# Altium PCB InterfaceBoard.PcbDoc
Units mm, origin at the board's own origin, x right, y up, seen from the top; angles counter-clockwise.
Board outline 24 x 45 mm, 4 copper layers (Top Layer, Int1 (GND), Int2 (PWR), Bottom Layer), stack 1.369 mm thick; 74 components, 58 nets, 253 pads, 0 vias.
Unrouted connection lines stored in the file: 183.
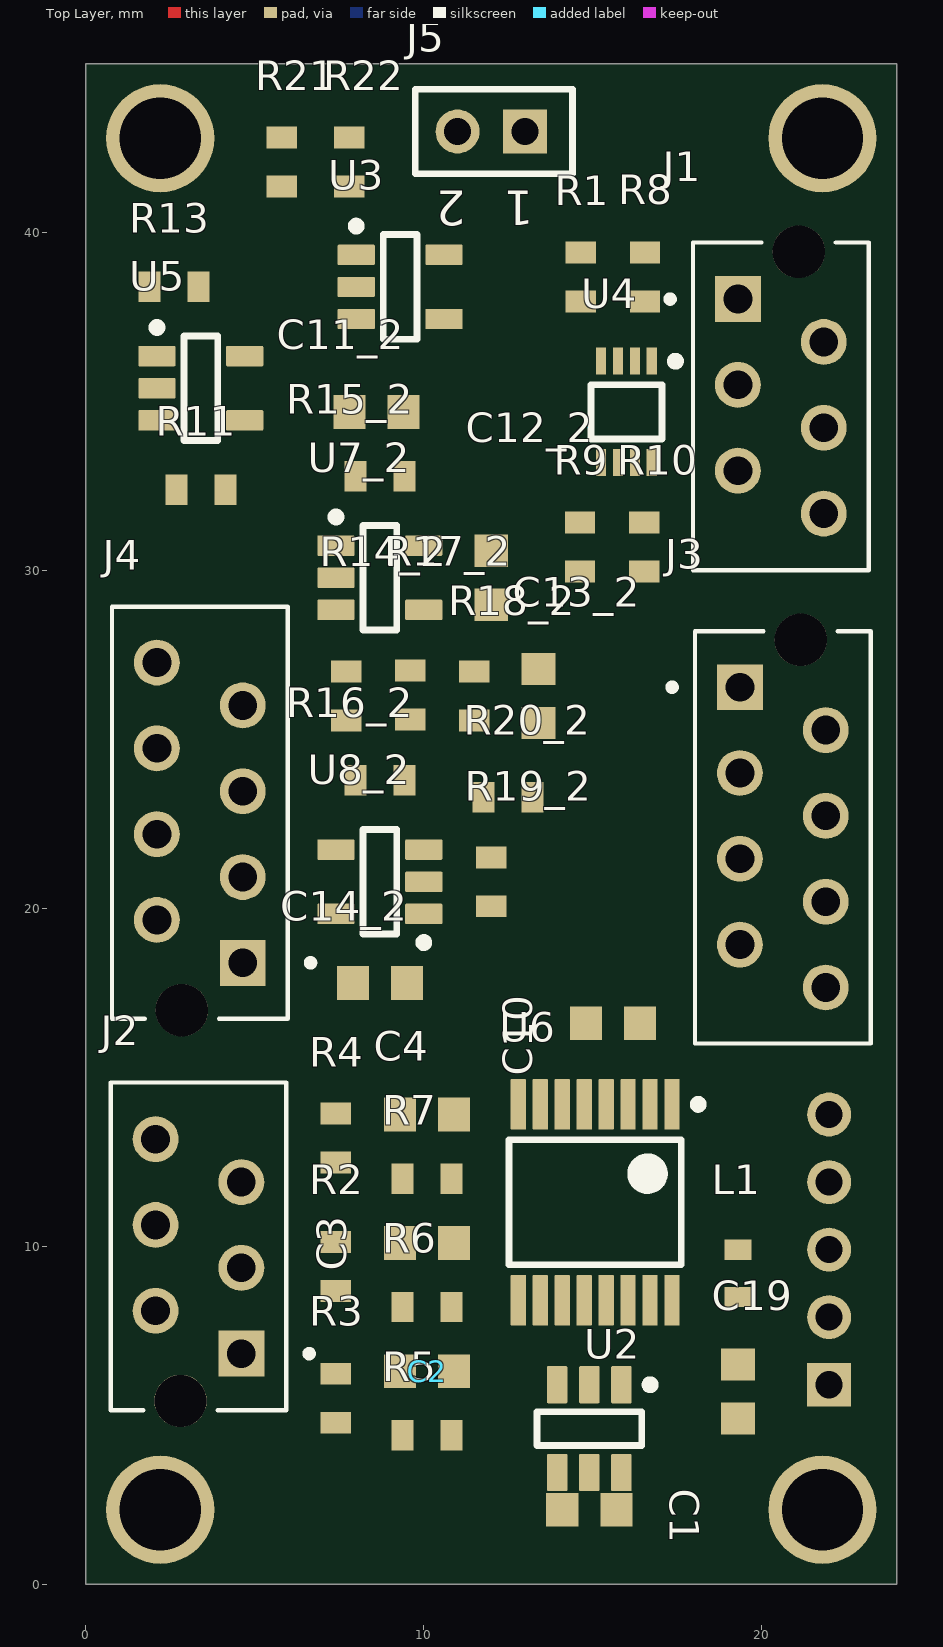
[diagram p0: Top Layer view]
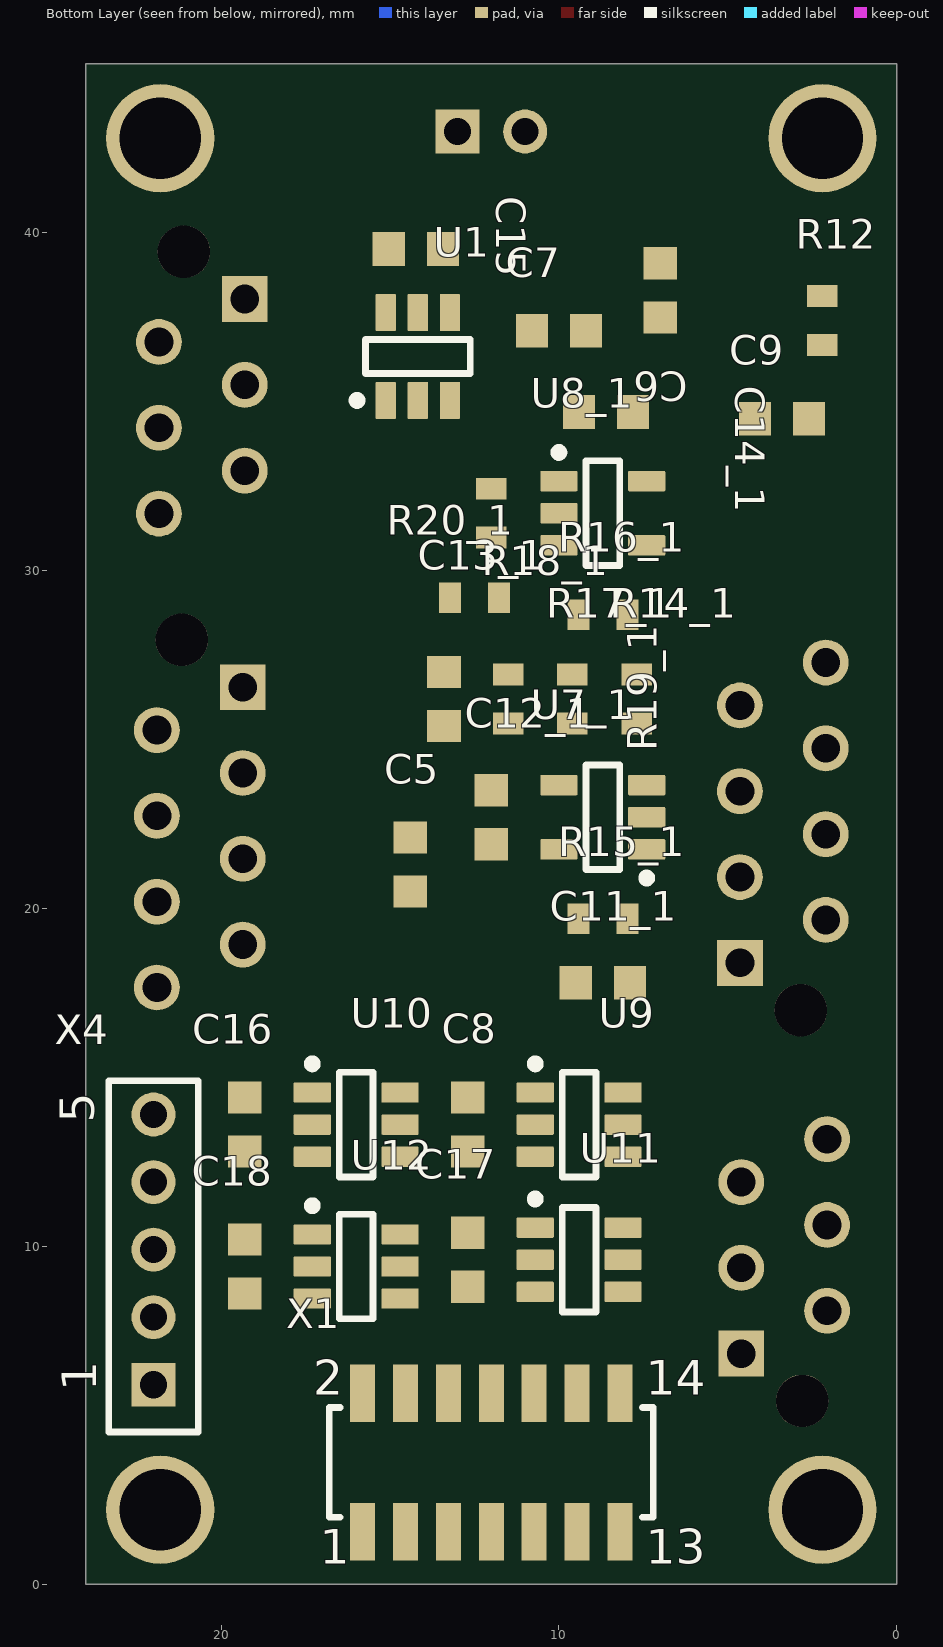
[diagram p1: Bottom Layer view, seen from below]
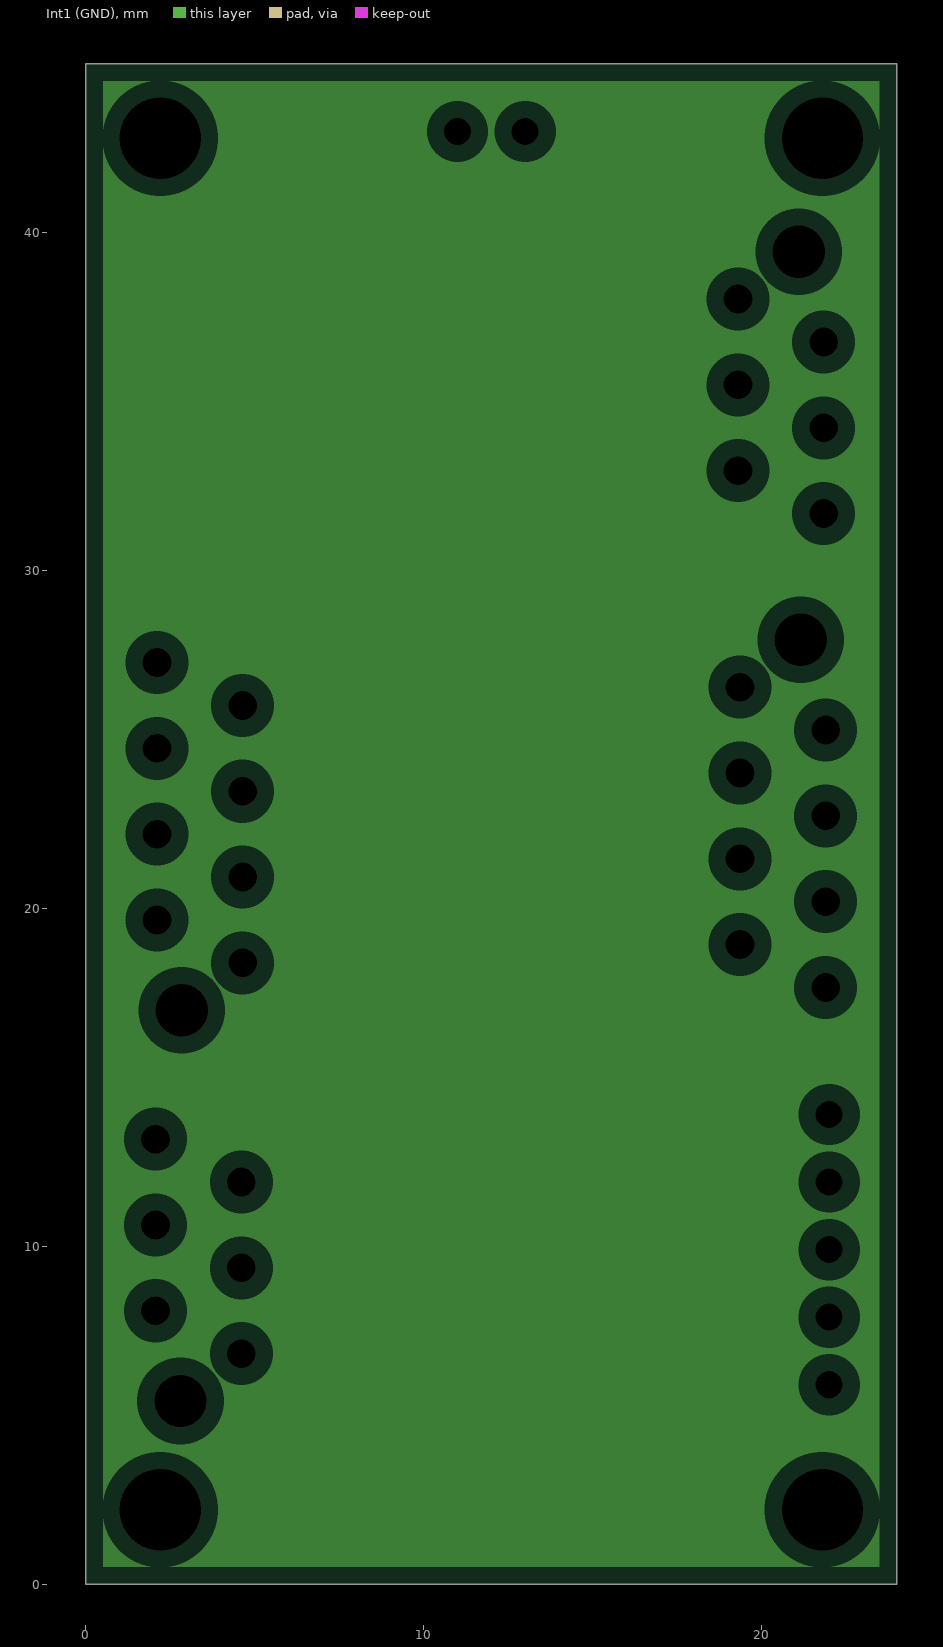
[diagram p2: Int1 (GND), clearances drawn from the general rule]
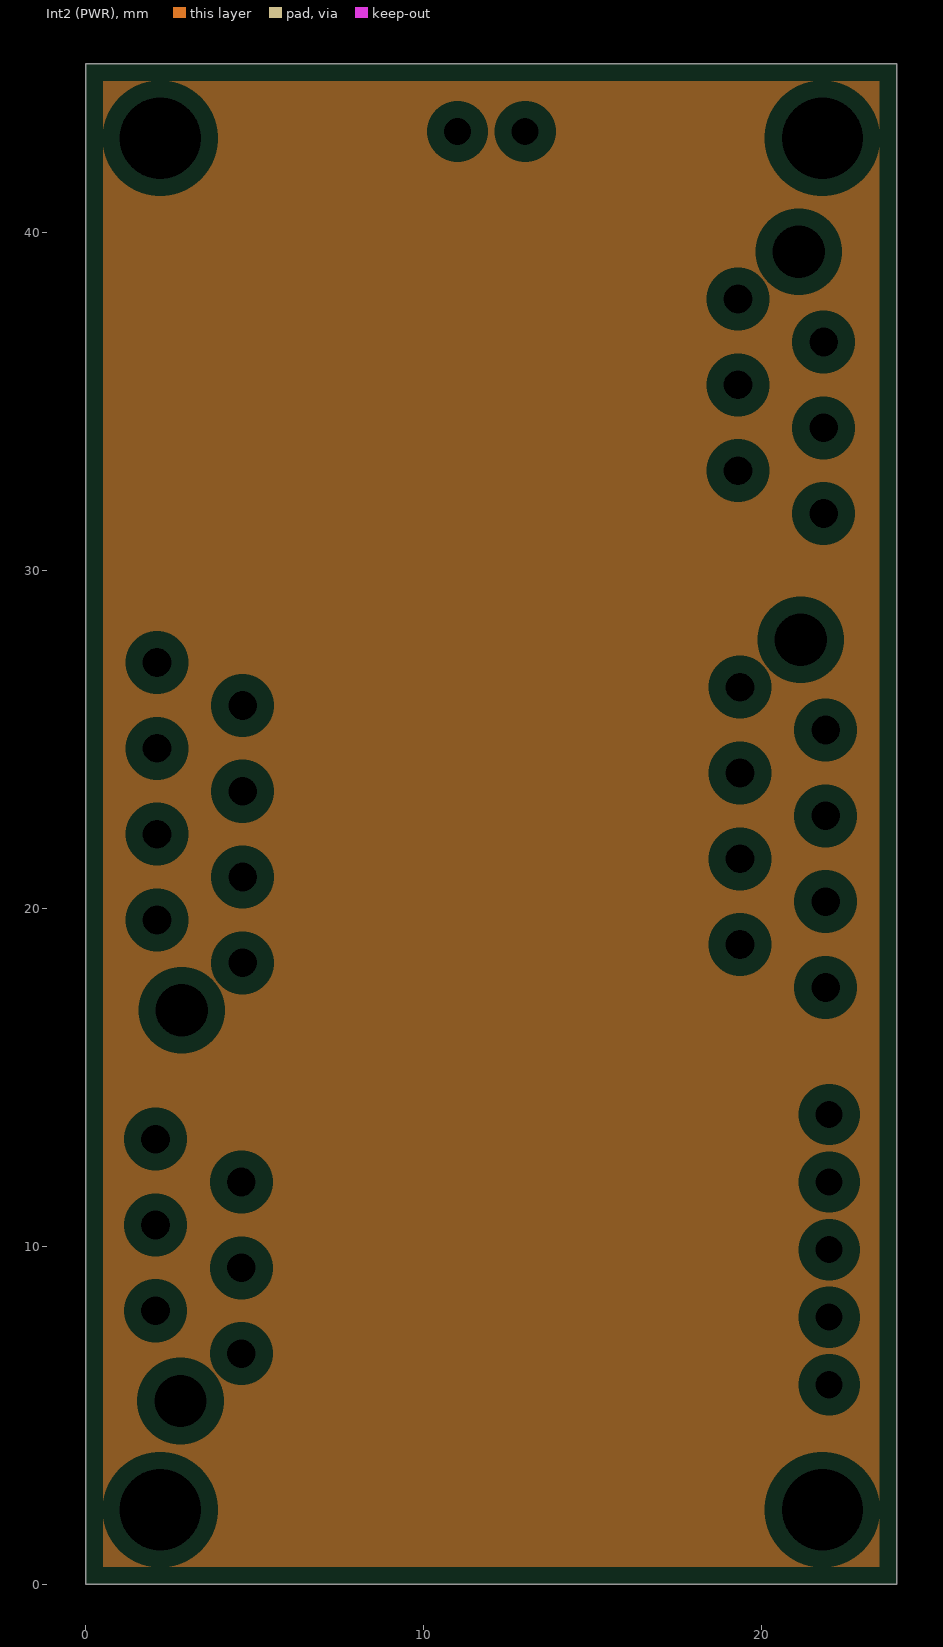
[diagram p3: Int2 (PWR), clearances drawn from the general rule]

## Layer stack, top to bottom
Top Solder: solder mask 0.0254, SM-001, Dk 4
Top Layer: signal copper 0.035
Dielectric 1: prepreg 0.1295, PP-017, Dk 4.3
Dielectric 2: prepreg 0.1295, PP-017, Dk 4.3
Int1 (GND): plane copper 0.035
Dielectric 3: core 0.7112, Core-039, Dk 4.8
Int2 (PWR): plane copper 0.035
Dielectric 4: prepreg 0.1295, PP-017, Dk 4.3
Dielectric 5: prepreg 0.1295, PP-017, Dk 4.3
Bottom Layer: signal copper 0.035
Bottom Solder: solder mask 0.0254, SM-001, Dk 4

## Board outline
0,0 24,0 24,45 0,45

## Design rules (kind name [scope] priority, off if disabled: settings)
Clearance [All] p1: gap=0.2 ignorepadtopadclearanceinfootprint=FALSE except(0: Arc-Hole Track-Hole SMDPad-Hole THPad-Hole Via-Hole Fill-Hole Poly-Hole Region-Hole Text-Hole)
HoleSize [All] p1: absolutevalues=TRUE maxlimit=3.5 minlimit=0.025 maxpercent=80.000 minpercent=20.000
PlaneClearance [All] p1: clearance=0.508
PlaneConnect [All] p1: planeconnectstyle=Relief reliefexpansion=0.508 reliefentries=4 reliefconductorwidth=0.254 reliefairgap=0.254
PolygonConnect [All] p1: connectstyle=Relief reliefconductorwidth=0.254 reliefentries=4 polygonreliefangle="90 Angle" airgapwidth=0.254
RoomDefinition Interfaceboard_1 [InComponentClass('Interfaceboard')] p1: confinementstyle=ConfineIn formatcopy=TRUE lockcomponents=FALSE outline -761,-442 -710.2,-442 -710.2,-416.6 -761,-416.6
RoomDefinition Interfaceboard [InComponentClass('Interfaceboard')] p2: confinementstyle=ConfineIn formatcopy=TRUE lockcomponents=FALSE outline -761,-442 -710.2,-442 -710.2,-416.6 -761,-416.6
RoomDefinition "Differential Cosinus Signal" [InComponentClass('Differential Cosinus Signal')] p3: confinementstyle=ConfineIn formatcopy=TRUE lockcomponents=FALSE outline 25.9,1.6 33.2,1.6 33.2,2.5 25.9,2.5
RoomDefinition "Differential Sinus Signal" [InComponentClass('Differential Sinus Signal')] p4: confinementstyle=ConfineIn formatcopy=TRUE lockcomponents=FALSE outline 25.9,2.6 33.2,2.6 33.2,3.5 25.9,3.5
RoutingCorners [All] p1: cornerstyle=45-Degree minsetback=2.5 maxsetback=2.5
RoutingVias [All] p1: holewidth=0.25 width=0.65 viastyle="Through Hole" minholewidth=0.25 minwidth=0.6 maxholewidth=1.8 maxwidth=2
SolderMaskExpansion [All] p1: expansion=0.102 istentingtop=FALSE
Width [All] p1: maxlimit=0.5 minlimit=0.15 preferedwidth=0.2
26 further rules are at their usual default settings.

## Classes and differential pairs
channel class Sensor_SINCOS: "Differential Cosinus Signal" "Differential Sinus Signal"
component class InterfaceBoard: J1 J2 J3 J4 J5 R1 X1 X4 X7
component class "Differential Sinus Signal": C11_2 C12_2 C13_2 C14_2 R14_2 R15_2 R16_2 R17_2 R18_2 R19_2 R20_2 U7_2 U8_2
component class "Differential Cosinus Signal": C11_1 C12_1 C13_1 C14_1 R14_1 R15_1 R16_1 R17_1 R18_1 R19_1 R20_1 U7_1 U8_1

## Components (designator, comment, footprint, x,y, rotation, side; value= is the part's Value field where it differs from the comment)
C1 "CAP CER 0603" CAPC1608X08N 14.9,2.2 r180 top value=100nF
C2 "CAP CER 1nF 0603" CAPC1608X08N 10.1,6.3 r180 top value=1nF
C3 "CAP CER 1nF 0603" CAPC1608X08N 10.1,10.1 r180 top value=1nF
C4 "CAP CER 1nF 0603" CAPC1608X08N 10.1,13.9 r180 top value=1nF
C5 "CAP CER 100nF 0603" CAPC1608X08N 14.4,21.3 r270 bottom value=100nF
C6 "CAP CER 100nF 0603" CAPC1608X08N 7,38.3 r90 bottom value=100nF
C7 "CAP CER 0603" CAPC1608X08N 10,37.1 r0 bottom value=10nF
C8 "CAP CER 100nF 0603" CAPC1608X08N 12.7,13.6 r270 bottom value=100nF
C9 "CAP CER 100nF 0603" CAPC1608X08N 3.4,34.5 r180 bottom value=100nF
C10 "CAP CER 100nF 0603" CAPC1608X08N 15.6,16.6 r0 top value=100nF
C11_1 "CAP CER 10pF 0603" CAPC1608X08N 8.7,17.8 r180 bottom value=10pF (schematic designator C11)
C11_2 "CAP CER 10pF 0603" CAPC1608X08N 8.6,34.7 r180 top value=10pF (schematic designator C11)
C12_1 "CAP CER 100nF 0603" CAPC1608X08N 12,22.7 r270 bottom value=100nF (schematic designator C12)
C12_2 "CAP CER 100nF 0603" CAPC1608X08N 12,29.79 r90 top value=100nF (schematic designator C12)
C13_1 "CAP CER 10pF 0603" CAPC1608X08N 13.4,26.2 r90 bottom value=10pF (schematic designator C13)
C13_2 "CAP CER 10pF 0603" CAPC1608X08N 13.4,26.29 r270 top value=10pF (schematic designator C13)
C14_1 "CAP CER 100nF 0603" CAPC1608X08N 8.6,34.7 r180 bottom value=100nF (schematic designator C14)
C14_2 "CAP CER 100nF 0603" CAPC1608X08N 8.7,17.79 r180 top value=100nF (schematic designator C14)
C15 "CAP CER 100nF 0603" CAPC1608X08N 14.235,39.525 r0 bottom value=100nF
C16 "CAP CER 100nF 0603" CAPC1608X08N 19.3,13.6 r270 bottom value=100nF
C17 "CAP CER 100nF 0603" CAPC1608X08N 12.7,9.6 r270 bottom value=100nF
C18 "CAP CER 100nF 0603" CAPC1608X08N 19.3,9.4 r270 bottom value=100nF
C19 "CAP CER 22uF 0603" CAPC1608X08N 19.3,5.7 r90 top value=22uF
J1 "CONNECT SMD 6pos 180°" TE_7-215079-6 19.3,38.04 r90 top
J2 "CONNECT SMD 6pos 180°" TE_7-215079-6 4.6,6.82 r270 top
J3 "CONNECT SMD 8pos 180°" TE_7-215079-8 19.36,26.55 r90 top
J4 "CONNECT SMD 8pos 180°" TE_7-215079-8 4.64,18.39 r270 top
J5 "CONNECT 2pos 90°" "62000611821 - 2pin" 13,43 r180 top value=WR-TBL322
L1 "IND SMD 2.2uH 0603" INDC1608X10N 19.3,9.2 r270 top value=2.2uH
R1 "RES SMD 10R 0603" RESC1508X04N 14.65,38.69 r270 top value=10R
R2 "RES SMD 560R 0603" RESC1508X04N 7.4,9.4 r270 top value=560R
R3 "RES SMD 560R 0603" RESC1508X04N 7.4,5.5 r270 top value=560R
R4 "RES SMD 560R 0603" RESC1508X04N 7.4,13.2 r270 top value=560R
R5 "RES SMD 1K 0603" RESC1508X04N 10.1,4.4 r180 top value=1kR
R6 "RES SMD 1K 0603" RESC1508X04N 10.1,8.2 r180 top value=1kR
R7 "RES SMD 1K 0603" RESC1508X04N 10.1,12 r180 top value=1kR
R8 "RES SMD 2K2 0603" RESC1508X04N 16.55,38.69 r270 top value=2k2
R9 "RES SMD 2K2 0603" RESC1508X04N 14.625,30.7 r270 top value=2k2
R10 "RES SMD 2K2 0603" RESC1508X04N 16.525,30.7 r270 top value=2k2
R11 "RES SMD 1K 0603" RESC1508X04N 3.4,32.4 r180 top value=1kR
R12 "RES SMD 560R 0603" RESC1508X04N 2.2,37.4 r90 bottom value=560R
R13 "RES SMD 1K 0603" RESC1508X04N 2.6,38.4 r180 top value=1kR
R14_1 "RES SMD 10K 0603" RESC1508X04N 7.7,26.2 r270 bottom value=10k (schematic designator R14)
R14_2 "RES SMD 10K 0603" RESC1508X04N 7.7,26.29 r90 top value=10k (schematic designator R14)
R15_1 "RES SMD 10K 0603" RESC1508X04N 8.7,19.7 r180 bottom value=10k (schematic designator R15)
R15_2 "RES SMD 10K 0603" RESC1508X04N 8.7,32.79 r180 top value=10k (schematic designator R15)
R16_1 "RES SMD 1K 0603" RESC1508X04N 8.7,28.7 r180 bottom value=1kR (schematic designator R16)
R16_2 "RES SMD 1K 0603" RESC1508X04N 8.7,23.79 r180 top value=1kR (schematic designator R16)
R17_1 "RES SMD 10K 0603" RESC1508X04N 9.6,26.2 r270 bottom value=10k (schematic designator R17)
R17_2 "RES SMD 10K 0603" RESC1508X04N 9.6,26.315 r90 top value=10k (schematic designator R17)
R18_1 "RES SMD 10K 0603" RESC1508X04N 11.5,26.2 r90 bottom value=10k (schematic designator R18)
R18_2 "RES SMD 10K 0603" RESC1508X04N 11.5,26.29 r270 top value=10k (schematic designator R18)
R19_1 "RES SMD 560R 0603" RESC1508X04N 12,31.7 r90 bottom value=560R (schematic designator R19)
R19_2 "RES SMD 560R 0603" RESC1508X04N 12,20.79 r270 top value=560R (schematic designator R19)
R20_1 "RES SMD 1K 0603" RESC1508X04N 12.5,29.2 r0 bottom value=1kR (schematic designator R20)
R20_2 "RES SMD 1K 0603" RESC1508X04N 12.5,23.29 r0 top value=1kR (schematic designator R20)
R21 "RES SMD 0603" RESC1508X04N 5.8,42.1 r90 top value=10k
R22 "RES SMD 0603" RESC1508X04N 7.8,42.1 r270 top value=10k
U1 "IC ADC 12BIT" SOT95P280X145-6N 14.175,36.34 r90 bottom value=ADS7883SDBVT
U2 "Analog Switch 2:1 1ch" SOT95P280X145-6N 14.9,4.6 r270 top value=NC7SB3157P6X
U3 "OPAMP 1 CIRCUIT" SOT95P280X145-5N 9.3,38.4 r0 top value=TS951RIYLT
U4 "IC INVERTER 3CH" TSSOP50P310X100-8N 16,34.7 r270 top value=TC7WH14FU
U5 "COMP 1 CIRCUIT" SOT95P280X145-5N 3.4,35.4 r0 top value=LMV7239
U6 "IC RECEIVER 0/4" TSOP65P640X120-16N 15.075,11.3 r270 top value=AM26C32IPW
U7_1 "OPAMP 1 CIRCUIT" SOT95P280X145-5N 8.7,22.7 r0 bottom value=TS951RIYLT (schematic designator U7)
U7_2 "OPAMP 1 CIRCUIT" SOT95P280X145-5N 8.7,29.79 r0 top value=TS951RIYLT (schematic designator U7)
U8_1 "COMP 1 CIRCUIT" SOT95P280X145-5N 8.7,31.7 r180 bottom value=LMV7239 (schematic designator U8)
U8_2 "COMP 1 CIRCUIT" SOT95P280X145-5N 8.7,20.79 r180 top value=LMV7239 (schematic designator U8)
U9 "Analog Switch 2:1 1ch" SOT95P280X145-6N 9.4,13.6 r180 bottom value=NC7SB3157P6X
U10 "Analog Switch 2:1 1ch" SOT95P280X145-6N 16,13.6 r180 bottom value=NC7SB3157P6X
U11 "Analog Switch 2:1 1ch" SOT95P280X145-6N 9.4,9.6 r180 bottom value=NC7SB3157P6X
U12 "Analog Switch 2:1 1ch" SOT95P280X145-6N 16,9.4 r180 bottom value=NC7SB3157P6X
X1 "CONNECT SMD 16pos 180°" 62301421021 12,3.6 r180 bottom
X4 "CONNECT HEADER 5pos 180°" "62000611821 - 5pin" 22,10.9 r90 bottom

## Footprints (in the part's own frame and the unit in brackets; to place one, negate y for a bottom-side part, rotate by r counter-clockwise, add the part's x,y. Pads: shape width x height; smd on the part's side, far side on the other; paste and mask are expansions set on the pad)
"62000611821 - 2pin" [mm] "Socket Header, Pitch 2.00 mm, THT, Vertical, single row, 6p"
  rect 1.3x1.3 hole 0.8: 1(0,0)
  round 1.3 hole 0.8: 2(2,0)
  silkscreen extent -1.4,-1.25 3.25,1.25, body extent -1.25,-1.25 3,1.25, height 4.35
"62000611821 - 5pin" [mm] "Socket Header, Pitch 2.00 mm, THT, Vertical, single row, 6p"
  rect 1.3x1.3 hole 0.8: 1(-5,0)
  round 1.3 hole 0.8: 2(-3,0) 3(-1,0) 4(1,0) 5(3,0)
  silkscreen extent -6.4,-1.33 4,1.33, body extent -6.25,-1.25 4,1.25, height 4.35
62301421021 [mm] "Socket Header, Pitch 1.27 mm, SMT, Vertical, dual row, 14p"
  rect 0.74x1.7 smd: 1(-3.81,-2.05) 2(-3.81,2.05) 3(-2.54,-2.05) 4(-2.54,2.05) 5(-1.27,-2.05) 6(-1.27,2.05) 7(0,-2.05) 8(0,2.05) 9(1.27,-2.05) 10(1.27,2.05) 11(2.54,-2.05) 12(2.54,2.05) 13(3.81,-2.05) 14(3.81,2.05)
  silkscreen extent -4.79,-1.62 4.79,1.63, body extent -4.64,-2.3 4.65,2.3, height 4.6
CAPC1608X08N [mm] "Chip Capacitor, 2-Leads, Body 1.60x0.80mm, IPC Medium Density"
  rect 0.95x1 smd: 1(-0.8,0) 2(0.8,0)
  body extent -0.87,-0.48 0.87,0.47, height 0.8
INDC1608X10N [mm] "Chip Inductor, 2-Leads, Body 1.60x0.80mm, IPC Medium Density"
  rect 0.6x0.8 smd: 1(-0.7,0) 2(0.7,0)
  body extent -0.87,-0.48 0.87,0.48, height 0.95
RESC1508X04N [mm] "Chip Resistor, 2-Leads, Body 1.55x0.80mm, IPC Medium Density"
  rect 0.65x0.9 smd: 1(-0.725,0) 2(0.725,0)
  body extent -0.85,-0.48 0.85,0.47, height 0.45
SOT95P280X145-5N [mm] "SOT23, 5-Leads, Body 2.90x2.80mm, Pitch 0.95mm, IPC Medium Density"
  rrect10% 1.1x0.6 smd: 1(-1.3,0.95) 2(-1.3,0) 3(-1.3,-0.95) 4(1.3,-0.95) 5(1.3,0.95)
  silkscreen extent -1.42,-1.55 0.5,1.92, body extent -1.5,-1.53 1.5,1.53, height 1.45
SOT95P280X145-6N [mm] "SOT23, 6-Leads, Body 2.90x2.80mm, Pitch 0.95mm, IPC Medium Density"
  rrect10% 1.1x0.6 smd: 1(-1.3,0.95) 2(-1.3,0) 3(-1.3,-0.95) 4(1.3,-0.95) 5(1.3,0) 6(1.3,0.95)
  silkscreen extent -1.42,-1.55 0.5,1.93, body extent -1.5,-1.53 1.5,1.53, height 1.45
TE_7-215079-6 [mm]
  rect 1.358x1.358 hole 0.85: 1(0,0)
  round 1.358 hole 0.85: 2(-1.27,-2.54) 3(-2.54,0) 4(-3.81,-2.54) 5(-5.08,0) 6(-6.35,-2.54)
  round 1.55 hole 1.55 unplated: ""(1.4,-1.8)
  silkscreen extent -8.03,-3.87 1.68,2.11, body extent -8,-3.81 1.7,1.39, height 4.2
TE_7-215079-8 [mm]
  rect 1.358x1.358 hole 0.85: 1(0,0)
  round 1.358 hole 0.85: 2(-1.27,-2.54) 3(-2.54,0) 4(-3.81,-2.54) 5(-5.08,0) 6(-6.35,-2.54) 7(-7.62,0) 8(-8.89,-2.54)
  round 1.55 hole 1.55 unplated: ""(1.4,-1.8)
  silkscreen extent -10.55,-3.87 1.66,2.11, body extent -10.54,-3.77 1.55,1.23, height 4.1
TSOP65P640X120-16N [mm] "TSOP, 16-Leads, Body 5.00x4.40mm, Pitch 0.65mm, IPC Medium Density"
  rrect10% 1.5x0.45 smd: 1(-2.9,2.275) 2(-2.9,1.625) 3(-2.9,0.975) 4(-2.9,0.325) 5(-2.9,-0.325) 6(-2.9,-0.975) 7(-2.9,-1.625) 8(-2.9,-2.275) 9(2.9,-2.275) 10(2.9,-1.625) 11(2.9,-0.975) 12(2.9,-0.325) 13(2.9,0.325) 14(2.9,0.975) 15(2.9,1.625) 16(2.9,2.275)
  silkscreen extent -3.02,-2.55 1.85,3.18, body extent -3.2,-2.55 3.2,2.55, height 1.2
TSSOP50P310X100-8N [mm] "TSSOP, 8-Leads, Body 2.00x2.30mm, Pitch 0.50mm, IPC Medium Density"
  rect 0.8x0.3 smd: 1(-1.5,0.75) 2(-1.5,0.25) 3(-1.5,-0.25) 4(-1.5,-0.75) 5(1.5,-0.75) 6(1.5,-0.25) 7(1.5,0.25) 8(1.5,0.75)
  silkscreen extent -1.62,-1.05 0.8,1.58, body extent -1.55,-1.05 1.55,1.05, height 1

## Part data
C1: library part "CAP CER 100nF 5% 10V 0603"
C2 C3 C4: library part "CAP CER 1nF 10% 10V 0603", "1nF ±10% 10V Condensateurs céramique X7R 0603 (1608 métrique)", Supplier Part Number 1=399-8984-1-ND, Supplier 1=Digi-Key
C5 C6 C8 C9 C10 C12_1 C12_2 C14_1 C14_2 C15 C16 C17 C18: library part "CAP CER 100nF 10% 10V 0603", "100nF ±10% 10V Condensateurs céramique X7R 0603 (1608 métrique)", Supplier Part Number 1=399-1095-1-ND, Supplier 1=Digi-Key
C7: library part "CAP CER 10nF 5% 10V 0603"
C11_1 C11_2 C13_1 C13_2: library part "CAP CER 10pF 10% 10V 0603", "10pF ±10% 10V Condensateurs céramique X7R 0603 (1608 métrique)", Supplier Part Number 1=399-17563-1-ND, Supplier 1=Digi-Key
C19: library part "CAP CER 47nF 10% 10V 0603", "22µF ±20% 6,3V Condensateurs céramique X5R 0603 (1608 métrique)", Supplier Part Number 1=399-14498-1-ND, Supplier 1=Digi-Key
J1 J2: library part "CONNECT SMD 6pos 180° 2.54mm"
  J1: Use="Digital Hall Sensor"
  J2: Use="Analog Hall Sensor"
J3 J4: library part "CONNECT SMD 8pos 180° 2.54mm"
  J3: Use="TTL Sensor"
  J4: Use="SINCOS Sensor"
J5: library part "CONNECT 2pos 90° 3.81mm", "2 Positions, bloc de jonction Embase, broche mâle, gainée (4 côtés) 0,150 po (3,81mm) 90°, engle droit Trou traversant", Supplier Part Number 1=732-2088-ND, Supplier 1=Digi-Key, Use="Motor Temperature Sensor"
L1: library part "IND SMD 150uH 1919", Current=500mA, DCR="DCR 180m", size="Size 0603"
R1: library part "RES SMD 10 OHM 1% 1/10W 0603", "10 Ohms ±1% 0,1W, 1/10W Pavé résistif 0603 (1608 métrique) AutomobileAEC-Q200 Couche épaisse", Supplier Part Number 1=RMCF0603FT10R0CT-ND, Supplier 1=Digi-Key
R2 R3 R4 R12 R19_1 R19_2: library part "RES SMD 560 OHM 0.1% 1/10W 0603", "560 Ohms ±1% 0,1W, 1/10W Pavé résistif 0603 (1608 métrique) AutomobileAEC-Q200 Couche épaisse", Supplier Part Number 1=A139816CT-ND, Supplier 1=Digi-Key
R5 R6 R7 R11 R13 R16_1 R16_2 R20_1 R20_2: library part "RES SMD 1K OHM 1% 1/10W 0603", "1 kOhms ±1% 0,1W, 1/10W Pavé résistif 0603 (1608 métrique) AutomobileAEC-Q200 Couche épaisse", Supplier Part Number 1=RMCF0603FT1K00CT-ND, Supplier 1=Digi-Key
R8 R9 R10: library part "RES SMD 2K2 OHM 1% 1/10W 0603", "2,2 kOhms ±1% 0,1W, 1/10W Pavé résistif 0603 (1608 métrique) AutomobileAEC-Q200 Couche épaisse", Supplier Part Number 1=RMCF0603FT2K20CT-ND, Supplier 1=Digi-Key
R14_1 R14_2 R15_1 R15_2 R17_1 R17_2 R18_1 R18_2: library part "RES SMD 10K OHM 1% 1/10W 0603", "10 kOhms ±1% 0,1W, 1/10W Pavé résistif 0603 (1608 métrique) AutomobileAEC-Q200 Couche épaisse", Supplier Part Number 1=RMCF0603FT10K0CT-ND, Supplier 1=Digi-Key
R21 R22: library part "RES SMD 10K OHM 0.1% 1/10W 0603", "10 kOhms ±0,1% 0,1W, 1/10W Pavé résistif 0603 (1608 métrique) AutomobileAEC-Q200 Couche mince", Supplier Part Number 1=P10KBDCT-ND, Tolerance=0.1%, Supplier 1=Digi-Key
U1: library part "IC ADC 12BIT SAR SOT23-6", "12 Bits, convertisseur analogique-numérique 1 Entrée 1 SAR SOT-23-6", Supplier Part Number 1=296-23635-1-ND, Supplier 1=Digi-Key
U2 U9 U10 U11 U12: library part "IC SWITCH SPDT", "1 Circuits, circuit intégré, commutateur 2:1 15Ohms SC-88 (SC-70-6)"
U3 U7_1 U7_2: library part "IC OPAMP GP 1 CIRCUIT SOT23-5", "CMOS Amplificateurs 1 Circuits Pôle à pôle SOT-23-5", Supplier Part Number 1=497-15708-1-ND, Supplier 1=Digi-Key
U4: library part "IC INVERTER 3CH 3-INP US8", "Inverseur IC 3 Canal US8", Supplier Part Number 1=TC7WH14FULJ(CTCT-ND, Supplier 1=Digi-Key
U5 U8_1 U8_2: library part "IC COMP PUSH-PULL 1 CIRCUIT SOT-23-5", "Comparateurs Usage général Pousser-tirer, rail-à-rail SOT-23-5", Supplier Part Number 1=LMV7239M5/NOPBCT-ND, Supplier 1=Digi-Key
U6: library part "IC RECEIVER 0/4 16TSSOP", "Récepteur 0/4 RS422, RS423 16-TSSOP", Supplier Part Number 1=296-25909-5-ND, Supplier 1=Digi-Key
X1: library part "CONNECT SMD 16pos 180° 2.54mm", system=connector, Use=CommandBoard
X4: library part "CONNECT HEADER 5pos 180° 2mm", system=connector, Use="Power Supplies"

## Free pads (board coordinates)
  round 3.2 hole 2.4: 1(2.2,2.2) 1(2.2,42.8) 1(21.8,2.2) 1(21.8,42.8)

## Nets (pads, with @x,y where several pads share a name; then routed paths per layer and width w, separated by ;. In a path a pad name is that pad's centre, name@x,y a point inside that pad or via, vN(x,y) a via of type N, cw(c..) or ccw(c..) an arc to the next point about the centre after c; other vN are vias at no path point)
1.65VREF: C13_1.2 C13_2.2 R18_1.2 R18_2.2 U3.1 U3.4
+3.3VA: C1.1 C12_1.2 C12_2.2 C19.2 L1.2 R21.2 U3.2 U7_1.5 U7_2.5
+3.3VD: C5.2 C6.1 C8.1 C10.2 C16.1 C17.1 C18.1 U2.5 U4.8 U6.4 U6.16 U9.5 U10.5 U11.5 U12.5 X4.2
+3.3VDA: L1.1 X4.3
+5VD: C9.1 C14_1.2 C14_2.2 C15.2 J2.1 J3.1 J4.1 J5.1 R1.2 R8.2 R9.2 R10.2 U1.1 U5.5 U8_1.5 U8_2.5 X4.1
AGND: C12_1.1 C12_2.1 C19.1 U7_1.2 U7_2.2 X4.4
DGND: C1.2 C2.1 C3.1 C4.1 C5.1 C6.2 C7.1 C8.2 C9.2 C10.1 C14_1.1 C14_2.1 C15.1 C16.2 C17.2 C18.2 J1.5 J1.6 J2.5 J2.6 J3.8 J4.8 R5.1 R6.1 R7.1 R13.1 R20_1.1 R20_2.1 R22.1 U1.2 U2.2 U3.5 U4.4 U5.2 U6.8 U6.12 U8_1.2 U8_2.2 U9.2 U10.2 U11.2 U12.2 X4.5
NetC4_2: C4.2 R4.1 R7.2 X1.14
NetC7_2: C7.2 R21.1 R22.2 U3.3
NetC11_1_1: C11_1.1 R14_1.2 R15_1.1 U7_1.4
NetC11_2_1: C11_2.1 R14_2.2 R15_2.1 U7_2.4
NetC13_1_1: C13_1.1 R17_1.2 R18_1.1 U7_1.3
NetC13_2_1: C13_2.1 R17_2.2 R18_2.1 U7_2.3
NetJ1_1: J1.1 R1.1
NetJ1_2: J1.2 R8.1 U4.1
NetJ1_3: J1.3 R9.1 U4.3
NetJ1_4: J1.4 R10.1 U4.6
NetJ2_2: J2.2 R3.2
NetJ2_3: J2.3 R2.2
NetJ2_4: J2.4 R4.2
NetJ3_2: J3.2 U6.2
NetJ3_3: J3.3 U6.1
NetJ3_4: J3.4 U6.6
NetJ3_5: J3.5 U6.7
NetJ3_6: J3.6 U6.10
NetJ3_7: J3.7 U6.9
NetJ4_2: J4.2 R16_2.1 R17_2.1 U8_2.3
NetJ4_3: J4.3 R14_2.1 R16_2.2 U8_2.4
NetJ4_4: J4.4 R16_1.1 R17_1.1 U8_1.3
NetJ4_5: J4.5 R14_1.1 R16_1.2 U8_1.4
NetJ4_6: J4.6 R11.2 U5.3
NetJ4_7: J4.7 R11.1 U5.4
NetJ5_2: J5.2 U1.3
NetR12_2: R12.2 U5.1
NetR19_1_2: R19_1.2 U8_1.1
NetR19_2_2: R19_2.2 U8_2.1
NetU1_4: U1.4 X1.10
NetU1_5: U1.5 X1.9
NetU1_6: U1.6 X1.11
NetU2_4: U2.4 X1.12
NetU4_2: U4.2 X1.3
NetU4_5: U4.5 X1.2
NetU4_7: U4.7 X1.1
NetU9_4: U9.4 X1.13
NetU10_4: U10.4 X1.4
NetU11_4: U11.4 X1.5
NetU12_4: U12.4 X1.6
OUT_A_HALL1: C2.2 R3.1 R5.2 U2.3
OUT_A_HALL2: C3.2 R2.1 R6.2 U9.3
OUT_COS_A: C11_1.2 R15_1.2 U7_1.1 U9.1
OUT_COS_D: R19_1.1 R20_1.2 U11.1
OUT_REF_D: R12.1 R13.2 U12.1
OUT_SIN_A: C11_2.2 R15_2.2 U2.1 U7_2.1
OUT_SIN_D: R19_2.1 R20_2.2 U10.1
OUT_TTL_A: U6.3 U10.3
OUT_TTL_B: U6.5 U11.3
OUT_TTL_C: U6.11 U12.3
SWITCH_CHOICE: U2.6 U9.6 U10.6 U11.6 U12.6 X1.7
pads on no net: J1. J2. J3. J4. U6.13 U6.14 U6.15 X1.8

## Polygon pours and split planes (outlines as drawn)
no net on Int1 (GND) (split plane): 23.49,0.51 0.51,0.51 0.51,44.49 23.49,44.49
no net on Int2 (PWR) (split plane): 23.49,0.51 0.51,0.51 0.51,44.49 23.49,44.49

## Silkscreen, mask and mechanical layers (free items; w line width, h text height)
Board:
  the board outline again, w1
Dimensions:
  the board outline again, w1
Fab Notes:
  drawing of 264 lines, arcs and shapes, not listed
  text "Board Layer Stack" at -24.982,94.85 h1.5
  text "Constant" at -16.691,94.85 h1.5
  text "Thickness" at -7.733,94.85 h1.5
  text "Material" at 2.298,94.85 h1.5
  text "Name" at 18.307,94.85 h1.5
  text "Layer" at 24.582,94.85 h1.5
  text "Top Overlay" at 18.307,91.85 h1.5
  text "4" at -16.691,88.85 h1.5
  text "0.025mm" at -7.733,88.85 h1.5
  text "SM-001" at 2.298,88.85 h1.5
  text "Top Solder" at 18.307,88.85 h1.5
  text "0.020mm" at -7.733,85.85 h1.5
  text "Nickel, Gold" at 2.298,85.85 h1.5
  text "Top Surface Finish" at 18.307,85.85 h1.5
  text "0.035mm" at -7.733,82.85 h1.5
  text "CF-004" at 2.298,82.85 h1.5
  text "Top Layer" at 18.307,82.85 h1.5
  text "1" at 24.583,82.85 h1.5
  text "4.3" at -16.691,79.85 h1.5
  text "0.129mm" at -7.733,79.85 h1.5
  text "PP-017" at 2.298,79.85 h1.5
  text "Dielectric 1" at 18.307,79.85 h1.5
  text "4.3" at -16.691,76.85 h1.5
  text "0.129mm" at -7.733,76.85 h1.5
  text "PP-017" at 2.298,76.85 h1.5
  text "Dielectric 2" at 18.307,76.85 h1.5
  text "0.035mm" at -7.733,73.85 h1.5
  text "CF-004" at 2.298,73.85 h1.5
  text "Int1 (GND)" at 18.307,73.85 h1.5
  text "2" at 24.584,73.85 h1.5
  text "4.8" at -16.691,70.85 h1.5
  text "0.711mm" at -7.733,70.85 h1.5
  text "Core-039" at 2.298,70.85 h1.5
  text "Dielectric 3" at 18.307,70.85 h1.5
  text "0.035mm" at -7.733,67.85 h1.5
  text "CF-004" at 2.298,67.85 h1.5
  text "Int2 (PWR)" at 18.307,67.85 h1.5
  text "3" at 24.583,67.85 h1.5
  text "4.3" at -16.691,64.85 h1.5
  text "0.129mm" at -7.733,64.85 h1.5
  text "PP-017" at 2.298,64.85 h1.5
  text "Dielectric 4" at 18.307,64.85 h1.5
  text "4.3" at -16.691,61.85 h1.5
  text "0.129mm" at -7.733,61.85 h1.5
  text "PP-017" at 2.298,61.85 h1.5
  text "Dielectric 5" at 18.307,61.85 h1.5
  text "0.035mm" at -7.733,58.85 h1.5
  text "CF-004" at 2.298,58.85 h1.5
  text "Bottom Layer" at 18.307,58.85 h1.5
  text "4" at 24.583,58.85 h1.5
  text "0.020mm" at -7.733,55.85 h1.5
  text "Nickel, Gold" at 2.298,55.85 h1.5
  text "Bottom Surface Finish" at 18.307,55.85 h1.5
  text "4" at -16.691,52.85 h1.5
  text "0.025mm" at -7.733,52.85 h1.5
  text "SM-001" at 2.298,52.85 h1.5
  text "Bottom Solder" at 18.307,52.85 h1.5
  text "Bottom Overlay" at 18.307,49.85 h1.5
  text "Configure the stack layer" at 49.1,4.9 h10 r90
Drill Drawing:
  circle w0.254: c-968.344,62.632 r0.921
  lines w0.2: -970.909,60.468 -802.339,60.468 ; -970.909,77.041 -802.339,77.041 ; -960.268,56.325 -960.268,81.184 ; -951.455,56.325 -951.455,81.184 ; -933.156,56.325 -933.156,81.184 ; -924.905,56.325 -924.905,81.184 ; -912.893,56.325 -912.893,81.184 ; -890.113,56.325 -890.113,81.184 ; -880.27,56.325 -880.27,81.184 ; -867.413,56.325 -867.413,81.184 ; -856.113,56.325 -856.113,81.184 ; -843.2,56.325 -843.2,81.184 ; -823.121,56.325 -823.121,81.184 ; -970.909,56.325 -802.339,56.325 -802.339,81.184 -970.909,81.184 -970.909,56.325
  lines w0.254: -969.265,65.854 -967.424,65.854 -967.424,67.696 -969.265,67.696 -969.265,65.854 ; -969.265,70.458 -968.805,70.458 -968.344,69.997 -967.884,70.458 -967.424,70.458 -967.884,70.918 -967.424,71.378 -967.884,71.378 -968.344,71.839 -968.805,71.378 -969.265,71.378 -968.805,70.918 -969.265,70.458 ; -969.265,75.982 -967.424,75.982 -968.344,74.14 -969.265,75.982
  text "Symbol" at -968.424,78.283 h2.4
  text "Count" at -959.025,78.283 h2.4
  text "Hole Size" at -950.212,78.283 h2.4
  text "Plated" at -931.913,78.283 h2.4
  text "Hole Type" at -923.662,78.283 h2.4
  text "Drill Layer Pair" at -911.65,78.283 h2.4
  text "Via/Pad" at -888.87,78.283 h2.4
  text "Pad Shape" at -879.027,78.283 h2.4
  text "Template" at -866.17,78.283 h2.4
  text "Description" at -854.871,78.283 h2.4
  text "Hole Tolerance (+)" at -841.958,78.283 h2.4
  text "Hole Tolerance (-)" at -821.879,78.283 h2.4
  text "4" at -959.025,74.14 h2
  text "1.550mm (61.02mil)" at -950.212,74.14 h2
  text "NPTH" at -931.913,74.14 h2
  text "Round" at -923.662,74.14 h2
  text "Top Layer - Bottom Layer" at -911.65,74.14 h2
  text "Pad" at -888.87,74.14 h2
  text "Rounded" at -879.027,74.14 h2
  text "c155hn155" at -866.17,74.14 h2
  text "4" at -959.025,69.997 h2
  text "2.400mm (94.49mil)" at -950.212,69.997 h2
  text "PTH" at -931.913,69.997 h2
  text "Round" at -923.662,69.997 h2
  text "Top Layer - Bottom Layer" at -911.65,69.997 h2
  text "Pad" at -888.87,69.997 h2
  text "Rounded" at -879.027,69.997 h2
  text "c320h240" at -866.17,69.997 h2
  text "7" at -959.025,65.854 h2
  text "0.800mm (31.50mil)" at -950.212,65.854 h2
  text "PTH" at -931.913,65.854 h2
  text "Round" at -923.662,65.854 h2
  text "Top Layer - Bottom Layer" at -911.65,65.854 h2
  text "Pad" at -888.87,65.854 h2
  text "(Mixed)" at -879.027,65.854 h2
  text "(Mixed)" at -866.17,65.854 h2
  text "28" at -959.025,61.711 h2
  text "0.850mm (33.47mil)" at -950.212,61.711 h2
  text "PTH" at -931.913,61.711 h2
  text "Round" at -923.662,61.711 h2
  text "Top Layer - Bottom Layer" at -911.65,61.711 h2
  text "Pad" at -888.87,61.711 h2
  text "(Mixed)" at -879.027,61.711 h2
  text "(Mixed)" at -866.17,61.711 h2
  text "43 Total" at -959.025,57.568 h2

## Dimensions
0,0 to 24,0 on Dimensions
0,0 to 0,45 on Dimensions

## Text inside footprints (layer, text, board x,y; h text height)
J5: Top Overlay "1" at 13.25,41.25 h1.02 r180; Top Overlay "2" at 11.25,41.25 h1.02 r180
X1: Bottom Overlay "1" at 17.075,0.6 h1.02; Bottom Overlay "2" at 17.275,5.6 h1.02; Bottom Overlay "13" at 7.425,0.6 h1.02; Bottom Overlay "14" at 7.425,5.6 h1.02
X4: Bottom Overlay "5" at 23.75,13.65 h1.02 r270; Bottom Overlay "1" at 23.7,5.7 h1.02 r270